# Altium PCB Monitor_Board_Model_H201.PcbDoc (part 4 of 5)
Units mm, origin at the board's own origin, x right, y up, seen from the top; angles counter-clockwise.
Board outline 50 x 40 mm, 6 copper layers (1-SIG-TOP, 2-GND, 3-PWR, 4-SIG-HOR, 5-SIG-VERT, 6-GND-BOT), stack 1.17 mm thick; 210 components, 140 nets, 699 pads, 51 vias.
Unrouted connection lines stored in the file: 491.
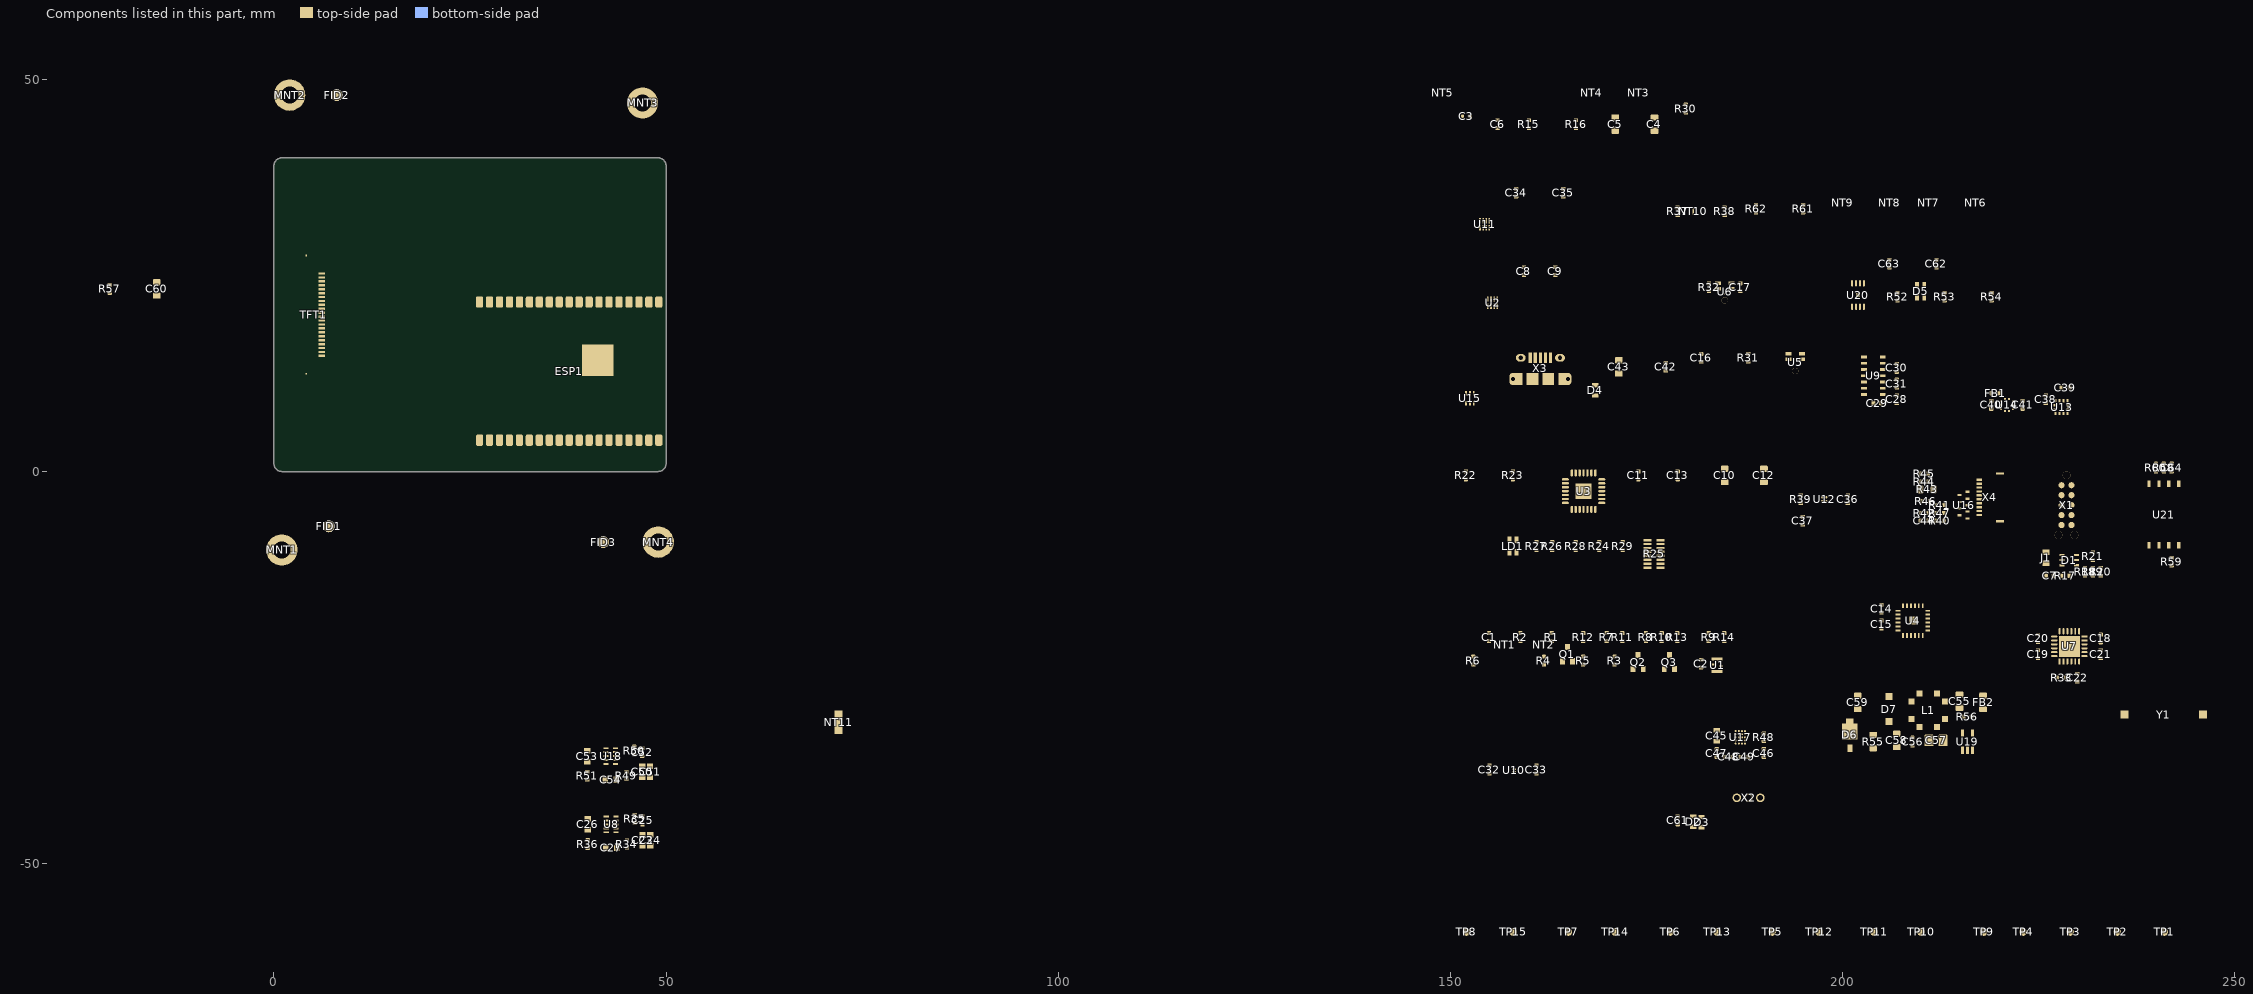
[diagram p6: the components of this part, seen from the top]

## Part data (continued)
U12: library part "IC TPS22930AYZVT PWR SWITCH P-CHAN 1:1 4DSBGA", "Power Switch/Driver 1:1 P-Channel 2A 4-DSBGA (0.88x0.88)", Current=-200mA, Manufacturer="Texas Instruments", Max Operating Temperature=85°C, Max Supply Voltage=5.5V, Min Operating Temperature=-40°C, On-State Resistance=35mR, Output Current=2A, Package Quantity=1, Quiescent Current=2.1uA, Supplier Part Number 1=296-35609-1-ND, ComponentLink1Description=http://www.ti.com/lit/ds/symlink/tps22930a.pdf?src-supplier=Digi-Key, ComponentLink1URL=http://www.ti.com/lit/ds/symlink/tps22930a.pdf?src-supplier=Digi-Key, ComponentLink2Description=http://www.ti.com/general/docs/lit/getliterature.tsp?genericPartNumber=TPS22930A&&fileType=pdf&src-supplier=Avnet, ComponentLink2URL=http://www.ti.com/general/docs/lit/getliterature.tsp?genericPartNumber=TPS22930A&&fileType=pdf&src-supplier=Avnet, ComponentLink3Description=https://www.verical.com/server-webapp/html/getDatasheet?partID=700707&src-supplier=Verical, ComponentLink3URL=https://www.verical.com/server-webapp/html/getDatasheet?partID=700707&src-supplier=Verical, Height=0.3mm, Lead Free="Lead Free", Length=0.92mm, Manufacturer Part Number=TPS22930AYZVT, Mount="Surface Mount", Number of Channels=1, Number of Outputs=1, Number of Pins=4, Packaging="Tape and Reel", Pricing 1="1=0.77, 10=0.675, 25=0.634, 100=0.4808 (USD)", Radiation Hardening=No, REACH SVHC="No SVHC", RoHS Compliant=Yes, Series=-, Stock 1=260, Supplier 1=Digi-Key, Turn-Off Delay Time=9.5us, Turn-On Delay Time=7.4us, Type="General Purpose", Voltage=5.5V, Width=0.918mm
U13: library part "IC BMA253 ACCEL 2-16G I2C/SPI 12LGA", "Accelerometer X, Y, Z Axis ±2g, 4g, 8g, 16g 8Hz ~ 1kHz 12-LGA (2x2)", Case/Package=LGA, Manufacturer="Bosch Sensortec", Max Operating Temperature=85°C, Min Operating Temperature=-40°C, Supplier Part Number 1=828-1071-1-ND, Axis="X, Y, Z", Bandwidth=8Hz, ComponentLink1Description=https://ae-bst.resource.bosch.com/media/_tech/media/application_notes/BST-MAS-HS000-05.pdf?src-supplier=Digi-Key, ComponentLink1URL=https://ae-bst.resource.bosch.com/media/_tech/media/application_notes/BST-MAS-HS000-05.pdf?src-supplier=Digi-Key, ComponentLink2Description=https://ae-bst.resource.bosch.com/media/_tech/media/application_notes/BST-MAS-HS000.pdf?src-supplier=Digi-Key, ComponentLink2URL=https://ae-bst.resource.bosch.com/media/_tech/media/application_notes/BST-MAS-HS000.pdf?src-supplier=Digi-Key, Manufacturer Part Number=BMA253, Mount="Surface Mount", Number of Pins=12, Output Type=SPI,I2C, Packaging="Tape and Reel", Pricing 1="1=1.73, 5=1.666, 10=1.353, 25=1.1656, 50=1.0094, 100=0.9158, 500=0.7701, 1000=0.6868, 5000=0.63 (USD)", Stock 1=49895, Supplier 1=Digi-Key
U14: library part "IC BMP388 SENSOR PRESSURE ABS", "Pressure Sensor 4.35PSI ~ 18.13PSI (30kPa ~ 125kPa) Absolute   10-WFLGA", Capacitance=4.7uF, Case/Package=LGA, Case Code (Imperial)=0805, Case Code (Metric)=2012, Continuous Drain Current (ID)=4A, Drain to Source Voltage (Vdss)=30V, Input Capacitance=645pF, Manufacturer="Bosch Sensortec", Max Operating Temperature=150°C, Max Power Dissipation=1.4W, Min Operating Temperature=-55°C, Operating Pressure=18.13PSI, Ratings=AEC-Q200, Supplier Part Number 1=828-1079-1-ND, Tolerance=20%, Voltage Rating=16V, ComponentLink1Description=https://ae-bst.resource.bosch.com/media/_tech/media/datasheets/BST-BMP388-DS001.pdf?src-supplier=Digi-Key, ComponentLink1URL=https://ae-bst.resource.bosch.com/media/_tech/media/datasheets/BST-BMP388-DS001.pdf?src-supplier=Digi-Key, ComponentLink2Description=https://ae-bst.resource.bosch.com/media/_tech/media/product_flyer/BST-BMP388-FL000-00.pdf?src-supplier=Digi-Key, ComponentLink2URL=https://ae-bst.resource.bosch.com/media/_tech/media/product_flyer/BST-BMP388-FL000-00.pdf?src-supplier=Digi-Key, ComponentLink3Description=https://ae-bst.resource.bosch.com/media/_tech/media/application_notes/BST-BMP380-HS000.pdf?src-supplier=Digi-Key, ComponentLink3URL=https://ae-bst.resource.bosch.com/media/_tech/media/application_notes/BST-BMP380-HS000.pdf?src-supplier=Digi-Key, Features="Soft Termination", Manufacturer Part Number=BMP388, Mount="Surface Mount", Number of Pins=10, Output Type=SPI,I2C, Packaging="Tape and Reel", Port Style="No Port", Pressure Type=Absolute, Pricing 1="1=3.81, 5=3.366, 10=2.973, 25=2.4124, 50=2.1318, 100=2.0757, 500=1.7391, 1000=1.6269, 5000=1.5147 (USD)", Rds On Max=50mR, Stock 1=30816, Supplier 1=Digi-Key, Termination=SMD/SMT
U15: library part "CMC 200MA 2LN SMD ESD", "2 Line Common Mode Choke Surface Mount  200mA DCR 2.5Ohm", Case/Package=QFN, Current=200mA, DC Resistance (DCR)=2.5R, Manufacturer=STMicroelectronics, Max Operating Temperature=85°C, Min Operating Temperature=-40°C, Package Quantity=1, Supplier Part Number 1=497-10773-1-ND, ComponentLink1Description=http://www.st.com/web/en/resource/technical/document/datasheet/CD00282307.pdf?src-supplier=Future+Electronics, ComponentLink1URL=http://www.st.com/web/en/resource/technical/document/datasheet/CD00282307.pdf?src-supplier=Future+Electronics, ComponentLink2Description=http://www.st.com/content/ccc/resource/technical/document/datasheet/3a/28/cf/d0/31/63/48/8c/CD00282307.pdf/files/CD00282307.pdf/jcr:content/translations/en.CD00282307.pdf?src-supplier=Digi-Key, ComponentLink2URL=http://www.st.com/content/ccc/resource/technical/document/datasheet/3a/28/cf/d0/31/63/48/8c/CD00282307.pdf/files/CD00282307.pdf/jcr:content/translations/en.CD00282307.pdf?src-supplier=Digi-Key, ComponentLink3Description=http://www.mouser.com/ds/2/389/ecmf02-2amx6-954491.pdf?src-supplier=Mouser, ComponentLink3URL=http://www.mouser.com/ds/2/389/ecmf02-2amx6-954491.pdf?src-supplier=Mouser, ComponentLink4Description=https://www.verical.com/server-webapp/html/getDatasheet?partID=259862&src-supplier=Verical, ComponentLink4URL=https://www.verical.com/server-webapp/html/getDatasheet?partID=259862&src-supplier=Verical, Current Rating=200mA, Depth=1.55mm, Height=0.022inch, Lead Free="Lead Free", Length=1.75mm, Manufacturer Part Number=ECMF02-2AMX6, Max Current Rating=200mA, Mount="Surface Mount", Number of Lines=2, Number of Pins=6, Packaging="Tape and Reel", Pricing 1="1=0.48, 10=0.418, 25=0.3888, 50=0.3288, 100=0.2989, 250=0.281, 500=0.2511, 1000=0.2033 (USD)", Radiation Hardening=No, REACH SVHC="No SVHC", Stock 1=23653, Supplier 1=Digi-Key, Termination=Flat, Width=0.059inch
U16: library part "TVS DIODE PP U-DFN3810-9", "5V (Typ) Clamp 5A (8/20µs) Ipp Tvs Diode Surface Mount U-DFN3810-9", Manufacturer=Diodes, Supplier Part Number 1=D3V3F8U9LP3810-7DICT-ND, Manufacturer Part Number=D3V3F8U9LP3810-7, Pricing 1="1=0.42, 10=0.317, 100=0.1508, 500=0.1336, 1000=0.104 (USD)", Stock 1=14880, Supplier 1=Digi-Key
U17: library part "IC BQ25157YFPR BATT CHG LI-ION 1CELL 20DSBGA", "Charger IC Lithium Ion/Polymer 20-DSBGA (2.02x1.62)", Manufacturer="Texas Instruments", Supplier Part Number 1=296-BQ25157YFPRCT-ND, ComponentLink1Description=https://octopart.com/click/track?ai=10049&ct=datasheets&sig=0484d06&at=physicalpart&sid=370&ppid=114161831&hlid=31393893&src-supplier=TI+store, ComponentLink1URL=https://octopart.com/click/track?ai=10049&ct=datasheets&sig=0484d06&at=physicalpart&sid=370&ppid=114161831&hlid=31393893&src-supplier=TI+store, Manufacturer Part Number=BQ25157YFPR, Pricing 1="1=2.97, 10=2.664, 25=2.5184, 100=2.0708, 250=1.8581, 500=1.791, 1000=1.4888 (USD)", Stock 1=0, Supplier 1=Digi-Key
U19: library part "IC TPS61169 WLED BACKLIGHT DRIVER SC70-5", "LED Driver IC 1 Output DC DC Regulator Step-Up (Boost) PWM Dimming 1.8A (Switch) SC-70-5", Case/Package=SC, Frequency=1.2MHz, Manufacturer="Texas Instruments", Max Input Voltage=5.5V, Max Operating Temperature=85°C, Max Output Current=2.4A, Max Output Voltage=38V, Min Input Voltage=2.7V, Min Operating Temperature=-40°C, Nominal Input Voltage (DC)=3.6V, Output Current=400mA, Output Current per Channel=1.8A, Package Quantity=3000, Supplier Part Number 1=296-40821-1-ND, ComponentLink1Description=http://www.ti.com/general/docs/lit/getliterature.tsp?genericPartNumber=TPS61169&&fileType=pdf&src-supplier=Element14, ComponentLink1URL=http://www.ti.com/general/docs/lit/getliterature.tsp?genericPartNumber=TPS61169&&fileType=pdf&src-supplier=Element14, ComponentLink2Description=http://www.ti.com/general/docs/lit/getliterature.tsp?genericPartNumber=TPS61169&amp;&amp;fileType=pdf&src-supplier=Farnell, ComponentLink2URL=http://www.ti.com/general/docs/lit/getliterature.tsp?genericPartNumber=TPS61169&amp;&amp;fileType=pdf&src-supplier=Farnell, ComponentLink3Description=http://www.ti.com/lit/ds/symlink/tps61169.pdf?src-supplier=Digi-Key, ComponentLink3URL=http://www.ti.com/lit/ds/symlink/tps61169.pdf?src-supplier=Digi-Key, ComponentLink4Description=http://www.ti.com/general/docs/lit/getliterature.tsp?genericPartNumber=TPS61169&&fileType=pdf&src-supplier=Avnet, ComponentLink4URL=http://www.ti.com/general/docs/lit/getliterature.tsp?genericPartNumber=TPS61169&&fileType=pdf&src-supplier=Avnet, ComponentLink5Description=http://www.ti.com/lit/gpn/tps61169?src-supplier=Mouser, ComponentLink5URL=http://www.ti.com/lit/gpn/tps61169?src-supplier=Mouser, Contact Plating=Gold, Dimming=PWM, Height=1.1mm, Lead Free="Lead Free", Length=2mm, Manufacturer Part Number=TPS61169DCKR, Max Input Voltage (DC)=5.5V, Max Supply Voltage=5.5V, Min Output Voltage=2.7V, Mount="Surface Mount", Number of Channels=1, Number of Outputs=1, Number of Pins=5, Output Type=Frequency, Output Voltage=38V, Packaging="Tape and Reel", Pricing 1="1=0.9, 10=0.805, 25=0.7644, 100=0.587, 250=0.5187, 500=0.4914, 1000=0.3822 (USD)", REACH SVHC="No SVHC", Stock 1=112915, Supplier 1=Digi-Key, Switching Frequency=1.2MHz, Topology=Boost, Weight=0.000705oz, Width=1.25mm
U20: library part "IC PCA9632TK,118 LED DRVR LIN DIM 25MA 8HVSON", "LED Driver IC 4 Output Power Switch  PWM Dimming 25mA 8-HVSON (3x3)", Frequency=400kHz, Low Level Output Current=100mA, Manufacturer="NXP Semiconductors", Max Operating Temperature=85°C, Max Power Dissipation=400mW, Max Supply Current=108uA, Max Supply Voltage=5.5V, Min Operating Temperature=-40°C, Min Supply Voltage=2.3V, Nominal Supply Current=150uA, Package Quantity=1, Supplier Part Number 1=568-8715-1-ND, 7B-I2C_ADDR="0b1100010 (0x62)", ComponentLink1Description=http://www.nxp.com/documents/data_sheet/PCA9632.pdf?src-supplier=Digi-Key, ComponentLink1URL=http://www.nxp.com/documents/data_sheet/PCA9632.pdf?src-supplier=Digi-Key, ComponentLink2Description=https://www.nxp.com/docs/en/brochure/75016950.pdf?src-supplier=Digi-Key, ComponentLink2URL=https://www.nxp.com/docs/en/brochure/75016950.pdf?src-supplier=Digi-Key, ComponentLink3Description=http://www.classic.nxp.com/documents/data_sheet/PCA9632.pdf?src-supplier=Avnet+Europe, ComponentLink3URL=http://www.classic.nxp.com/documents/data_sheet/PCA9632.pdf?src-supplier=Avnet+Europe, Contact Plating=Gold, Lead Free="Lead Free", Manufacturer Part Number=PCA9632TK,118, Mount="Surface Mount", Number of Outputs=4, Number of Pins=8, Number of Segments=4, Output Voltage=5.5V, Packaging="Tape and Reel", Power Dissipation=400mW, Pricing 1="1=1.33, 10=1.192, 25=1.1312, 100=0.8686, 250=0.7676, 500=0.7272, 1000=0.5656, 2500=0.5373 (USD)", Radiation Hardening=No, Stock 1=2394, Supplier 1=Digi-Key
U21: library part "IC MT29F1G01ABAFDWB FLASH 1GBIT SPI 8UPDFN", "FLASH - NAND Memory IC 1Gb (1G x 1) SPI   8-U-PDFN (8x6)", Manufacturer="Micron Technology", Max Operating Temperature=85°C, Min Operating Temperature=-40°C, Supplier Part Number 1=557-1654-1-ND, Interface=SPI,Serial, Manufacturer Part Number="MT29F1G01ABAFDWB-IT:F TR", Memory Type=FLASH,NAND, Number of Pins=8, Packaging="Tape and Reel", Pricing 1="1=2.68, 10=2.414, 25=2.3768, 50=2.3704, 100=2.1181, 250=2.0485, 500=2.041, 1000=1.9006 (USD)", Stock 1=2188, Supplier 1=Digi-Key
X1: library part TC2050-IDC-NL-JTAG, "A connection to Plug-Of-Nails™ Adapter Cable"
X2: library part "CONN HEADER TH R/A 3POS 1.5MM", "Connector Header Through Hole, Right Angle 3 position 0.059\" (1.50mm)", Color=Natural,White, Contact Resistance=30mR, Current Rating=1A, Flammability Rating="UL94 V-0", Housing Color=Beige, Insulation Resistance=500MR, Manufacturer=JST, Manufacturer Part Number=S3B-ZR(LF)(SN), Max Operating Temperature=85°C, Max Voltage Rating (AC)=50V, Min Operating Temperature=-25°C, Supplier Part Number 1=455-1670-ND, Body Plating=Tin, ComponentLink1Description=http://www.jst-mfg.com/product/pdf/eng/eZH.pdf?src-supplier=Digi-Key, ComponentLink1URL=http://www.jst-mfg.com/product/pdf/eng/eZH.pdf?src-supplier=Digi-Key, ComponentLink2Description=https://www.verical.com/server-webapp/html/getDatasheet?partID=722697&src-supplier=Verical, ComponentLink2URL=https://www.verical.com/server-webapp/html/getDatasheet?partID=722697&src-supplier=Verical, ComponentLink3Description=http://www.produktinfo.conrad.com/datenblaetter/725000-749999/741155-da-01-en-STIFTLEISTE_GEWINKELT_3_POL_RM1_5.pdf?src-supplier=Conrad, ComponentLink3URL=http://www.produktinfo.conrad.com/datenblaetter/725000-749999/741155-da-01-en-STIFTLEISTE_GEWINKELT_3_POL_RM1_5.pdf?src-supplier=Conrad, Connector Type="Male Pin", Contact Material=Brass,Copper,Tin, Contact Mating Length=0.094inch, Contact Plating=Tin,Copper, Depth=6mm, Fastening Type=Detent, Gender=Male, Height=7.2mm, Housing Material=Polyamide, Lead Free="Lead Free", Lead Pitch=1.5mm, Length=6mm, Material=Nylon, Max Current Rating=1A, Mount="Through Hole", Number of Contacts=3, Number of Pins=3, Number of Positions=3, Number of Rows=1, Orientation="Right Angle", Packaging=Bulk, Panel Thickness=3.5mm, pin_1=BATT+, pin_2=TS, pin_3=BATT-, Pitch=1.5mm, Pricing 1="1=0.2, 10=0.184, 100=0.1274, 500=0.1078, 1000=0.0882, 5000=0.0784, 10000=0.071 (USD)", REACH SVHC="No SVHC", Stock 1=0, Supplier 1=Digi-Key, Termination=Press-Fit, Voltage Rating=50V, Voltage Rating (AC)=50V, Voltage Rating (DC)=50V, Width=3.5mm
X3: library part CONN_USB_MICRO_B_RECPT_SMT_R/A, "USB - micro B USB 2.0 Receptacle Connector 5 Position Surface Mount, Right Angle; Through Hole", Manufacturer="Amphenol FCI", Manufacturer Part Number=10118194-0001LF
X4: "10 Position FFC, FPC Connector Contacts, Top and Bottom 0.020\" (0.50mm) Surface Mount, Right Angle", Actuator Color=Black, Current Rating=500mA, Flammability Rating="UL94 V-0", Housing Color=White, Manufacturer=Molex, Manufacturer Part Number=503480-1000, Max Operating Temperature=85°C, Max Voltage Rating (AC)=50V, Min Operating Temperature=-40°C, Package Quantity=1, Supplier Part Number 1=WM1389CT-ND, Actuator Material=Nylon,Glass,Polyamide, ComponentLink1Description=https://www.verical.com/server-webapp/html/getDatasheet?partID=735332&src-supplier=Verical, ComponentLink1URL=https://www.verical.com/server-webapp/html/getDatasheet?partID=735332&src-supplier=Verical, ComponentLink2Description=http://www.mouser.com/ds/2/276/5034801000_FFC_FPC_CONNECTORS-179433.pdf?src-supplier=Mouser, ComponentLink2URL=http://www.mouser.com/ds/2/276/5034801000_FFC_FPC_CONNECTORS-179433.pdf?src-supplier=Mouser, ComponentLink3Description=http://www.molex.com/webdocs/datasheets/pdf/en-us/5034801000_FFC_FPC_CONNECTORS.pdf?src-supplier=Avnet+Europe, ComponentLink3URL=http://www.molex.com/webdocs/datasheets/pdf/en-us/5034801000_FFC_FPC_CONNECTORS.pdf?src-supplier=Avnet+Europe, ComponentLink4Description=https://www.molex.com/pdm_docs/pk/SPK-503480-001.pdf?src-supplier=Digi-Key, ComponentLink4URL=https://www.molex.com/pdm_docs/pk/SPK-503480-001.pdf?src-supplier=Digi-Key, Contact Material=Bronze, Contact Plating=Gold, Depth=3.6mm, ELV=Compliant, Gender=Receptacle, Halogen Free="Low Halogen", Housing Material=Polymer, Length=6.7mm, Material=Bronze, Mating Cycles=10, Max Voltage Rating (DC)=50V, Number of Circuits=10, Number of Contacts=10, Number of Positions=10, Number of Rows=1, Orientation="Right Angle", Packaging="Tape and Reel", pin_1=KEY_1, pin_2=KEY_2, pin_3=KEY_3, pin_4=KEY_4, pin_5=KEY_5, pin_6=KEY_6, pin_7=KEY_7, pin_8=KEY_8, pin_9=GND, pin_10=GND, pin_MP1=MP1, pin_MP2=MP2, Pitch=0.5mm, Pricing 1="1=0.89, 10=0.738, 100=0.6148, 1000=0.4918 (USD)", Radiation Hardening=No, REACH SVHC=Unknown, Series="BackFlip, Easy-On 503480", Stackable=No, Stock 1=36029, Supplier 1=Digi-Key, Termination=Solder, Voltage Rating=50V, Voltage Rating (AC)=50V, Wire/Cable Type=Straight
Y1: library part "SPEAKER CMS-151135-078S 15 X 11 MM ENCLOSED", "8 Ohms General Purpose Speaker 700mW 100Hz ~ 20kHz Top Rectangular", Manufacturer=CUI, Max Power Dissipation=1W, Power Rating=700mW, Self Resonant Frequency=550Hz, Supplier Part Number 1=102-4616-ND, ComponentLink1Description=https://www.cui.com/product/resource/digikeypdf/CMS-15113-078x.pdf?src-supplier=Digi-Key, ComponentLink1URL=https://www.cui.com/product/resource/digikeypdf/CMS-15113-078x.pdf?src-supplier=Digi-Key, Impedance=8R, Manufacturer Part Number=CMS-151135-078S, Packaging=Tray, Pricing 1="1=2.07, 10=1.72, 25=1.5888, 50=1.4932, 100=1.4013, 500=1.2016, 1000=1.17 (USD)", Sensing Method=Magnetic, Shape=Rectangular, Stock 1=1971, Supplier 1=Digi-Key, Type="General Purpose"
Logo1: ClassName=PCB_FEATURE

## Via types
v1: diameter 0.55, hole 0.2, 1-SIG-TOP to 6-GND-BOT, 32 vias
v2: diameter 0.605, hole 0.3, 1-SIG-TOP to 6-GND-BOT, tented both sides, 15 vias
v3: diameter 0.6, hole 0.3, 1-SIG-TOP to 6-GND-BOT, tented both sides, 4 vias